# Altium PCB EtherWiz3K4KNic.PcbDoc (part 2 of 2)
Units mm, origin at the board's own origin, x right, y up, seen from the top; angles counter-clockwise.
Board outline 99.29 x 46.58 mm, 4 copper layers (Top Layer, GND, 5V, Bottom Layer), stack 1.582 mm thick; 69 components, 129 nets, 421 pads, 204 vias.
Unrouted connection lines stored in the file: 3.
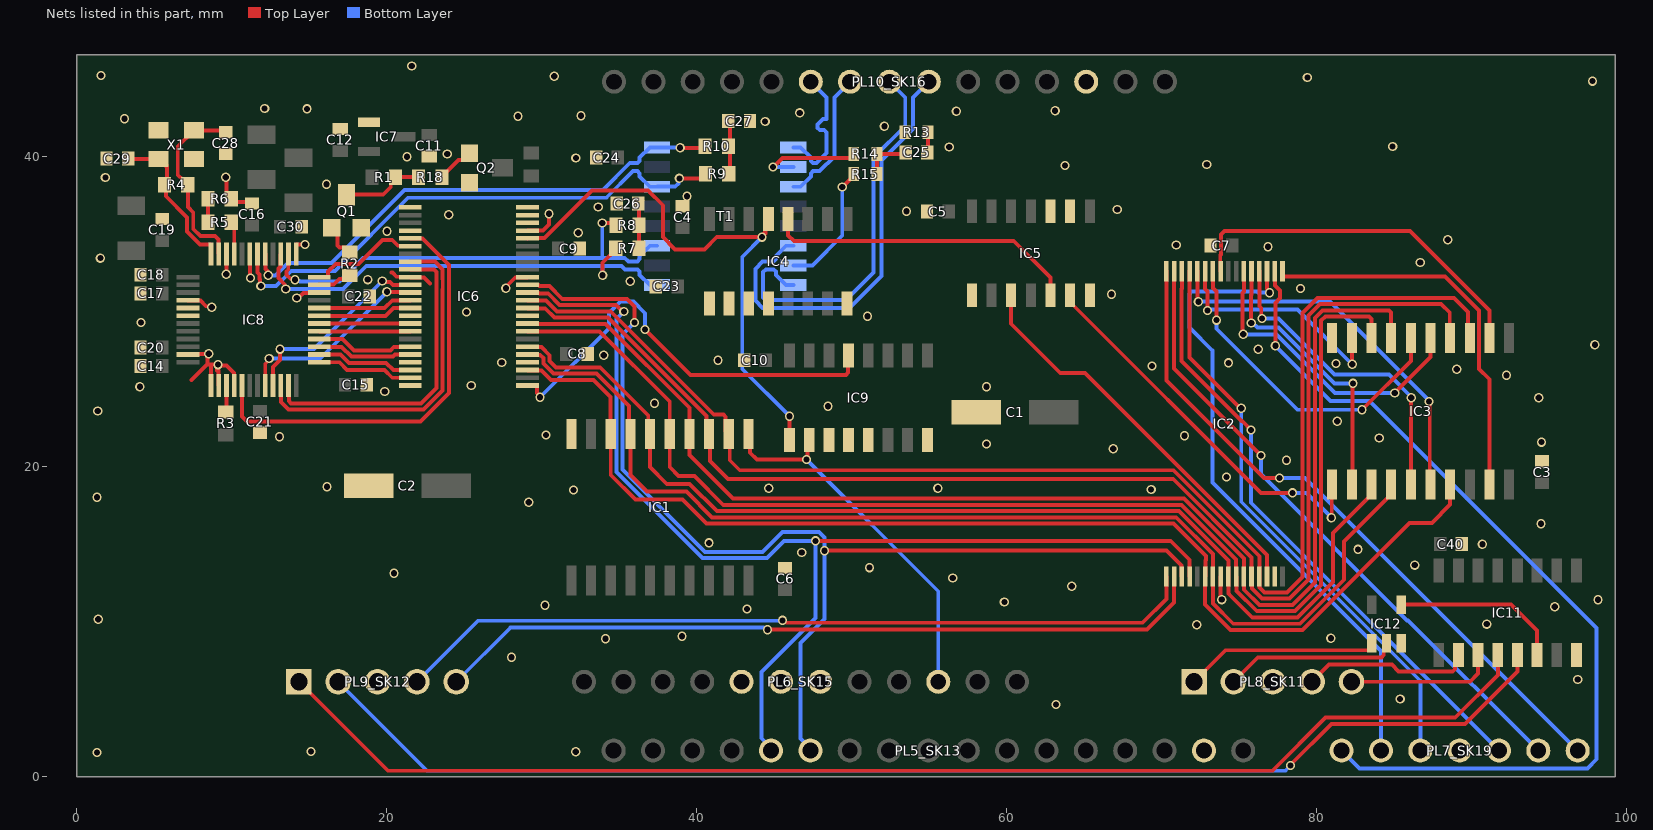
[diagram p4: the nets of this part, all layers, seen from the top]

## Via types
v1: diameter 0.6, hole 0.4, Top Layer to Bottom Layer, tented both sides, 204 vias

## Nets (pads, with @x,y where several pads share a name; then routed paths per layer and width w, separated by ;. In a path a pad name is that pad's centre, name@x,y a point inside that pad or via, vN(x,y) a via of type N, cw(c..) or ccw(c..) an arc to the next point about the centre after c; other vN are vias at no path point) (continued)
D1: IC1.8 IC2.22 IC3.17 IC6.3 | length 76
  Top Layer w0.254: IC6.3@29.094,26.244 29.117,26.221 29.976,26.221 30.59,25.608 33.345,25.608 34.44,24.514 34.44,22.13 IC1.8@34.458,22.113 34.458,19.467 36.043,17.882 39.091,17.882 40.648,16.324 70.795,16.324 72.875,14.245 72.875,13.982 72.848,13.955 72.848,12.947 IC2.22@72.825,12.924 72.825,11.113 74.474,9.463 79.123,9.463 86.026,16.366 87.461,16.366 88.645,17.55 IC3.17@88.645,18.859
D2: IC1.7 IC2.23 IC3.14 IC6.5 | length 73.1
  Top Layer w0.254: IC6.5@29.094,27.244 29.117,27.221 29.896,27.221 30.108,27.009 30.108,26.661 30.757,26.012 33.551,26.012 35.634,23.929 35.634,22.207 IC1.7@35.728,22.113 35.728,19.467 36.805,18.39 39.345,18.39 41.006,16.728 70.963,16.728 73.325,14.366 IC2.23@73.325,12.924 73.325,11.184 74.642,9.867 78.956,9.867 81.796,12.708 81.796,15.171 84.835,18.209 IC3.14@84.835,18.859
D3: IC1.6 IC2.25 IC3.13 IC6.6 | length 70.8
  Top Layer w0.254: IC6.6@29.094,27.744 29.117,27.721 29.988,27.721 30.512,27.196 30.512,26.828 30.924,26.416 33.782,26.416 36.878,23.32 36.878,22.232 IC1.6@36.998,22.113 36.998,19.975 38.075,18.898 39.548,18.898 41.313,17.132 71.13,17.132 74.325,13.938 IC2.25@74.325,12.924 74.325,11.816 74.479,11.662 74.479,11.661 75.868,10.271 78.788,10.271 81.077,12.56 81.077,15.722 83.565,18.209 IC3.13@83.565,18.859
D4: IC1.5 IC2.26 IC3.8 IC6.8 | length 84.8
  Top Layer w0.254: IC6.8@29.094,28.744 33.743,28.744 38.268,24.22 IC1.5@38.268,22.113 38.268,19.975 38.837,19.406 39.853,19.406 41.722,17.536 71.297,17.536 74.825,14.009 IC2.26@74.825,12.924 74.848,12.901 74.848,11.987 76.16,10.675 78.621,10.675 80.32,12.374 80.32,29.431 80.584,29.695 83.416,29.695 83.565,29.546 IC3.8@83.565,28.309
D5: IC1.4 IC2.27 IC3.7 IC6.9 | length 85.8
  Top Layer w0.254: IC6.9@29.094,29.244 29.116,29.222 34.123,29.222 39.538,23.807 IC1.4@39.538,22.113 39.538,20.757 42.354,17.94 71.465,17.94 75.325,14.08 IC2.27@75.325,12.924 ; IC2.27@75.335,12.914 75.348,12.901 75.348,12.059 76.327,11.079 78.454,11.079 79.916,12.541 79.916,29.598 80.416,30.099 84.686,30.099 84.835,29.95 IC3.7@84.835,28.309
D6: IC1.3 IC2.28 IC3.4 IC6.11 | length 89.7
  Top Layer w0.254: IC6.11@29.094,30.244 29.117,30.221 30.231,30.221 30.826,29.626 34.29,29.626 40.64,23.276 40.64,22.28 40.869,22.052 40.869,20.371 42.034,19.205 70.771,19.205 75.825,14.152 IC2.28@75.825,12.924 75.848,12.901 75.848,12.13 76.494,11.483 78.286,11.483 79.512,12.709 79.512,29.766 80.249,30.503 80.947,30.503 88.064,30.503 88.617,29.95 IC3.4@88.617,28.336
D7: IC1.2 IC2.29 IC3.3 IC6.12 | length 91.1
  Top Layer w0.254: IC6.12@29.094,30.744 30.279,30.744 30.993,30.03 34.457,30.03 41.109,23.378 41.731,23.378 41.88,23.229 41.88,22.311 IC1.2@42.078,22.113 ; IC1.2@42.139,22.113 42.139,20.422 42.786,19.774 70.773,19.774 76.325,14.223 IC2.29@76.325,12.924 76.348,12.901 76.348,12.21 76.67,11.887 78.119,11.887 79.108,12.876 79.108,29.933 80.082,30.907 88.879,30.907 89.789,29.997 89.789,28.435 IC3.3@89.915,28.309
ERX_N: IC8.5 R10.2 T1.8 | length 33.3
  Top Layer w0.254: IC8.5@12.156,33.732 12.164,33.724 12.164,32.755 12.289,32.63 12.289,32.425 v1(12.355,32.359) ; v1(38.938,40.589) 40.449,40.589 R10.2@40.55,40.691
  Bottom Layer w0.254: v1(12.355,32.359) 12.363,32.351 12.818,32.351 13.623,33.156 16.436,33.156 21.151,37.871 33.96,37.871 35.687,39.599 36.173,39.599 36.322,39.747 36.322,39.958 36.979,40.615 T1.8@37.449,40.615 37.461,40.602 38.925,40.602 v1(38.938,40.589)
ERX_P: IC8.6 R9.2 T1.6 | length 35
  Top Layer w0.254: IC8.6@11.656,33.732 11.656,32.544 11.778,32.422 11.778,32.12 11.806,32.092 11.806,31.733 v1(11.872,31.666) ; v1(38.887,38.616) 40.279,38.616 R9.2@40.576,38.913
  Bottom Layer w0.254: v1(11.872,31.666) 12.852,31.666 13.834,32.648 16.646,32.648 21.362,37.363 34.17,37.363 35.897,39.091 36.173,39.091 36.322,38.942 36.322,38.732 36.979,38.075 T1.6@37.449,38.075 37.461,38.087 38.623,38.087 38.821,38.285 38.821,38.55 v1(38.887,38.616)
ETX_N: IC8.2 R8.2 T1.3 | length 30
  Top Layer w0.254: IC8.2@13.656,33.732 13.656,33.137 13.641,33.122 13.641,32.72 13.521,32.6 13.521,32.389 13.773,32.137 14.007,32.137 v1(14.073,32.071) ; v1(33.909,35.738) 34.649,35.738 R8.2@34.834,35.553
  Bottom Layer w0.254: v1(14.073,32.071) 14.139,32.005 14.362,32.005 14.395,31.972 16.959,31.972 18.464,33.477 19.871,33.477 19.878,33.47 20.356,33.47 20.363,33.477 33.909,33.477 ; v1(33.909,35.738) 33.909,33.477 ; T1.3@37.449,34.265 36.979,34.265 36.322,33.608 36.322,33.397 36.173,33.249 35.593,33.249 35.364,33.477 33.909,33.477
ETX_P: IC8.3 R7.2 T1.1 | length 30.5
  Top Layer w0.254: IC8.3@13.156,33.732 13.133,33.709 13.133,32.93 13.013,32.81 13.013,32.179 13.414,31.778 13.414,31.544 v1(13.48,31.478) ; v1(33.934,32.36) 33.915,32.379 33.915,33.168 34.785,34.037 R7.2@34.785,34.112
  Bottom Layer w0.254: v1(13.48,31.478) 13.494,31.464 17.169,31.464 18.674,32.969 19.66,32.969 19.667,32.962 20.566,32.962 20.573,32.969 33.934,32.969 ; v1(33.934,32.36) 33.934,32.969 ; T1.1@37.449,31.725 36.979,31.725 36.322,32.382 36.322,32.592 36.173,32.741 35.382,32.741 35.154,32.969 33.934,32.969
GND: C1.2 C2.2 C3.1 C4.1 C5.1 C6.1 C7.1 C8.1 C9.1 C10.1 C11.1 C12.1 C14.1 C15.1 C16.1 C17.1 C18.1 C19.1 C20.1 C21.1 C22.1 C23.1 C24.1 C26.1 C27.1 C28.1 C29.1 C30.1 C40.1 IC1.10 IC2.24 IC3.10 IC4.3 IC4.4 IC4.8 IC5.7 IC5.9 IC5.10 IC6.4 IC6.10 IC6.15 IC6.21 IC6.22 IC6.23 IC6.24 IC6.25 IC6.28 IC6.34 IC6.39 IC6.45 IC6.48 IC7.1 IC8.1 IC8.7 IC8.10 IC8.16 IC8.23 IC8.25 IC8.26 IC8.28 IC8.46 IC9.3 IC9.4 IC9.5 IC9.8 IC11.8 IC12.3 PL5_SK13.16 PL6_SK15.5 PL6_SK15.7 PL7_SK19.4 PL8_SK11.3 PL9_SK12.3 PL10_SK16.13 Q1.2 Q2.2 R6.1 R13.1 X1.2 X1.4 | length 28.4
  Top Layer w0.254: IC8.23@7.168,27.244 7.191,27.267 v1@8.479,27.267 ; IC8.16@7.168,30.744 7.191,30.721 7.97,30.721 8.331,30.36 8.64,30.36 v1(8.706,30.294) ; 7.406,25.594 8.406,26.594 ; v1(8.506,27.294) v1@8.479,27.267 ; IC8.25@8.656,25.256 8.656,26.594 ; 9.04,26.228 9.04,26.528 v1(9.106,26.594) ; 9.133,26.228 9.133,25.279 IC8.26@9.156,25.256 ; v1(9.606,38.694) 9.658,38.642 9.658,37.592 10.156,37.094 C16.1@11.306,37.094 ; v1(9.64,32.428) 9.648,32.436 9.648,33.724 IC8.10@9.656,33.732 ; IC8.28@10.156,25.256 10.133,25.279 10.133,26.058 9.663,26.528 9.172,26.528 v1(9.106,26.594) ; IC8.7@11.156,33.732 11.179,33.71 11.179,32.206 v1(11.201,32.183) ; IC8.1@14.156,33.732 14.156,34.32 14.179,34.343 14.713,34.343 v1(14.721,34.351) ; v1(14.194,30.887) 14.287,30.887 14.621,31.221 15.621,31.221 IC8.46@15.644,31.244 ; 20.306,32.53 20.37,32.53 20.633,32.267 21.495,32.267 IC6.34@21.518,32.244 21.541,32.221 22.405,32.221 22.792,31.835 ; v1(27.689,31.518) 27.755,31.584 27.755,31.685 28.292,32.221 29.071,32.221 IC6.15@29.094,32.244 ; IC6.21@29.094,35.244 30.085,35.244 30.478,35.638 v1(30.478,36.337) ; C4.1@39.091,36.819 39.107,36.819 39.38,37.092 v1(39.38,37.462) ; IC2.24@73.825,12.924 73.825,11.594 73.902,11.517 v1(73.902,11.423) ; 8.406,26.594 8.656,26.594 ; 8.406,26.594 8.44,26.628 8.44,27.228 v1@8.479,27.267 ; 8.656,26.594 v1(9.106,26.594)
  other v1: 1.295,1.549 32.195,1.609 15.113,1.626 63.197,4.65 85.413,5.014 96.88,6.266 28.056,7.704 34.125,8.899 80.943,8.926 39.053,9.06 72.288,9.804 91.001,9.84 1.372,10.16 43.256,10.82 95.396,10.958 30.214,11.058 59.868,11.268 98.19,11.415 64.211,12.284 56.54,12.818 20.472,13.123 51.156,13.487 86.353,13.65 46.791,14.467 82.696,14.666 90.722,14.996 40.802,15.085 94.507,16.317 29.159,17.704 1.295,18.034 32.048,18.497 69.342,18.533 44.653,18.609 55.575,18.609 16.138,18.713 74.212,19.34 78.086,20.414 66.891,21.16 58.718,21.476 94.539,21.59 84.072,21.86 13.074,21.935 71.494,22.007 30.277,22.047 81.356,22.936 1.346,23.597 48.489,23.901 37.287,24.105 94.361,24.46 19.871,24.857 58.718,25.159 4.062,25.161 25.456,25.248 92.278,25.908 89.071,26.299 69.396,26.5 81.275,26.665 74.339,26.706 27.42,26.73 41.377,26.873 34.011,27.203 76.251,27.584 97.986,27.874 4.14,29.312 51.029,29.718 25.144,29.987 66.777,31.14 78.987,31.506 35.712,31.979 18.771,32.08 86.709,33.183 1.512,33.468 76.879,34.199 70.968,34.315 88.487,34.656 32.36,35.103 20.015,35.201 24.003,36.271 53.543,36.5 67.158,36.601 33.654,36.774 16.106,38.237 1.834,38.678 63.779,39.446 72.928,39.509 32.207,39.929 21.311,40.011 23.906,40.194 56.312,40.64 84.931,40.676 52.121,41.986 44.425,42.291 3.067,42.458 28.473,42.621 32.543,42.654 46.656,42.843 56.769,42.951 63.144,42.977 14.856,43.103 12.116,43.129 97.834,44.892 79.426,45.127 30.81,45.212 1.549,45.263 21.615,45.872
GND_CHASS: C25.1 R13.2 | length 1.3
  Top Layer w0.254: C25.1@54.898,40.292 54.948,40.342 R13.2@54.948,41.592
LA2: IC2.20 IC6.13 PL5_SK13.5 | length 73.8
  Top Layer w0.254: IC6.13@29.094,31.244 29.117,31.221 29.803,31.221 29.853,31.171 30.423,31.171 31.161,30.434 34.801,30.434 35.212,30.023 v1(35.306,30.023) ; v1(47.676,15.215) 70.606,15.215 71.825,13.996 IC2.20@71.825,12.924
  Bottom Layer w0.254: v1(35.306,30.023) 34.823,29.54 34.823,19.667 40.387,14.104 44.533,14.104 45.644,15.215 v1(47.676,15.215) 47.676,10.236 44.196,6.756 44.196,2.473 44.806,1.864 PL5_SK13.5@44.806,1.676
LA3: IC2.19 IC6.14 PL5_SK13.6 | length 73.1
  Top Layer w0.254: IC6.14@29.094,31.744 29.117,31.721 29.803,31.721 29.853,31.671 30.495,31.671 31.328,30.838 35.507,30.838 35.992,30.353 v1(35.992,29.312) ; v1(48.26,14.58) 48.285,14.605 70.336,14.605 71.302,13.639 71.302,12.947 IC2.19@71.325,12.924
  Bottom Layer w0.254: v1(35.992,29.312) 35.227,28.547 35.227,19.835 40.554,14.508 44.252,14.508 45.535,15.792 47.915,15.792 48.26,15.446 v1(48.26,14.58) 48.26,10.172 46.711,8.623 46.711,2.466 47.346,1.831 PL5_SK13.6@47.346,1.676
LA4: IC2.18 PL9_SK12.5 | length 50.3
  Top Layer w0.254: v1(44.573,9.483) 69.071,9.483 70.825,11.236 IC2.18@70.825,12.924
  Bottom Layer w0.254: PL9_SK12.5@24.486,6.121 28.001,9.637 44.326,9.637 44.479,9.483 v1(44.573,9.483)
LA5: IC2.17 PL9_SK12.4 | length 52.2
  Top Layer w0.254: v1(45.542,10.084) 45.636,10.084 45.788,9.931 68.783,9.931 70.325,11.473 IC2.17@70.325,12.924
  Bottom Layer w0.254: PL9_SK12.4@21.946,6.121 25.884,10.06 45.518,10.06 v1(45.542,10.084)
LA6: IC2.16 PL7_SK19.7 | length 43.5
  Top Layer w0.254: IC2.16@70.325,32.624 70.325,25.576 76.622,19.279 v1(77.622,19.279)
  Bottom Layer w0.254: v1(77.622,19.279) 79.273,19.279 PL7_SK19.7@96.876,1.676
LA7: IC2.15 PL7_SK19.6 | length 40.7
  Top Layer w0.254: IC2.15@70.825,32.624 70.825,26.33 v1(76.429,20.726)
  Bottom Layer w0.254: v1(76.429,20.726) 76.429,19.529 85.871,10.087 85.925,10.087 PL7_SK19.6@94.336,1.676
LA8: IC2.14 PL7_SK19.5 | length 39.5
  Top Layer w0.254: IC2.14@71.325,32.624 71.325,31.512 71.294,31.481 71.294,26.823 75.168,22.949 75.222,22.949 v1(75.794,22.377)
  Bottom Layer w0.254: v1(75.794,22.377) 75.794,17.678 PL7_SK19.5@91.796,1.676
LA9: IC2.13 PL7_SK19.3 | length 37.2
  Top Layer w0.254: IC2.13@71.825,32.624 71.825,31.266 71.813,31.254 71.813,27.066 75.105,23.774 v1(75.159,23.774)
  Bottom Layer w0.254: v1(75.159,23.774) 75.159,17.742 86.716,6.185 PL7_SK19.3@86.716,1.676
LA10: IC2.3 PL7_SK19.2 | length 41.3
  Top Layer w0.254: IC2.3@76.825,32.624 76.825,31.492 76.988,31.328 v1(76.988,31.235)
  Bottom Layer w0.254: v1(76.988,31.235) 76.247,31.235 76.18,31.302 71.962,31.302 71.813,31.153 71.813,28.977 73.3,27.491 73.3,18.979 84.176,8.103 PL7_SK19.2@84.176,1.676
LA11: IC2.2 PL7_SK19.1 | length 59
  Top Layer w0.254: IC2.2@77.325,32.624 77.325,31.714 77.673,31.365 77.673,30.886 77.361,30.574 v1(77.361,27.805)
  Bottom Layer w0.254: v1(77.361,27.805) 78.922,26.243 80.91,24.255 83.441,24.255 98.095,9.601 98.095,1.118 97.511,0.533 82.779,0.533 PL7_SK19.1@81.636,1.676
LA12: IC2.31 IC4.1
LA13: IC4.2 IC5.1
LA14: IC11.5 PL9_SK12.2 | length 82.2
  Top Layer w0.254: v1(78.334,0.711) 78.334,0.762 80.975,3.404 89.611,3.404 92.989,6.782 IC11.5@92.989,7.841
  Bottom Layer w0.254: PL9_SK12.2@16.866,6.121 22.608,0.379 78.001,0.379 v1(78.334,0.711)
LA15: IC11.4 PL9_SK12.1 | length 83.6
  Top Layer w0.254: PL9_SK12.1@14.326,6.121 20.068,0.379 77.163,0.379 80.592,3.808 88.974,3.808 91.719,6.553 IC11.4@91.719,7.841
LA16: IC11.3 PL8_SK11.5 | length 9.6
  Top Layer w0.254: PL8_SK11.5@82.271,6.121 89.916,6.121 90.449,6.655 IC11.3@90.449,7.841
LA17: IC11.2 PL8_SK11.4 | length 10.9
  Top Layer w0.254: PL8_SK11.4@79.731,6.121 80.833,7.223 84.877,7.223 85.319,6.782 88.808,6.782 88.956,6.931 88.956,7.618 IC11.2@89.179,7.841
LA18: IC12.2 PL8_SK11.2 | length 11.3
  Top Layer w0.254: PL8_SK11.2@74.651,6.121 76.225,7.696 84.209,7.696 84.358,7.845 84.358,8.432 IC12.2@84.531,8.605
LA21: IC12.1 PL8_SK11.1 | length 12.7
  Top Layer w0.254: PL8_SK11.1@72.111,6.121 74.143,8.153 83.408,8.153 83.581,8.326 IC12.1@83.581,8.605
LINK: IC8.17
NetC25_2: C25.2 R14.1 R15.1 | length 3.2
  Top Layer w0.254: R15.1@51.648,38.892 R14.1@51.648,40.192 53.398,40.192 C25.2@53.498,40.292
NetC26_2: C26.2 R7.1 R8.1 | length 2.9
  Top Layer w0.254: R7.1@36.289,34.098 R8.1@36.289,35.598 C26.2@36.289,37.048
NetC27_2: C27.2 R9.1 R10.1 | length 3.5
  Top Layer w0.254: R9.1@42.145,38.913 42.145,40.596 R10.1@42.05,40.691 42.15,40.79 C27.2@42.15,42.316
NetC28_2: C28.2 IC8.11 R4.2 X1.1 | length 12.2
  Top Layer w0.254: IC8.11@9.156,33.732 9.133,33.755 9.133,34.667 8.906,34.894 7.964,34.894 7.51,35.348 7.51,36.408 7.156,36.762 7.156,38.269 6.858,38.567 6.783,38.567 6.506,38.844 6.506,40.669 X1.1@7.556,41.719 9.481,41.719 C28.2@9.606,41.594
NetC29_2: C29.2 IC8.12 R4.1 X1.3 | length 10.1
  Top Layer w0.254: C29.2@3.306,39.894 3.331,39.869 5.381,39.869 5.779,39.471 5.779,39.349 5.806,39.322 5.806,38.344 R4.1@5.656,38.194 5.738,38.112 5.738,37.462 7.106,36.094 7.106,35.181 7.944,34.343 8.633,34.343 8.656,34.32 IC8.12@8.656,33.732
NetIC8_9: IC8.9 R5.2 | length 2.1
  Top Layer w0.254: R5.2@9.956,35.794 10.156,35.594 IC8.9@10.156,33.732
NetIC8_27: IC8.27 R3.1 | length 1.7
  Top Layer w0.254: R3.1@9.606,23.544 9.656,23.594 IC8.27@9.656,25.256
NetIC8_47: IC8.47 R2.1 | length 2.3
  Top Layer w0.254: IC8.47@15.644,31.744 15.667,31.767 16.579,31.767 16.933,32.121 17.258,32.121 17.556,32.419 R2.1@17.556,32.494
NetIC11_6: IC11.6 IC12.4 | length 11.1
  Top Layer w0.254: IC12.4@85.481,11.105 92.578,11.105 94.259,9.423 IC11.6@94.259,7.841
NetQ1_1: Q1.1 R2.2 | length 2.3
  Top Layer w0.254: Q1.1@16.364,35.417 16.385,35.417 16.806,34.996 16.806,34.294 16.958,34.142 17.308,34.142 R2.2@17.606,33.844
NetQ1_3: Q1.3 R1.1 R18.1 | length 5.3
  Top Layer w0.254: Q1.3@17.4,37.561 19.773,37.561 20.258,38.046 20.258,38.396 R1.1@20.556,38.694 R18.1@22.056,38.694
NetQ2_1: Q2.1 R18.2 | length 2.5
  Top Layer w0.254: R18.2@23.556,38.694 23.556,38.769 23.854,39.067 23.879,39.067 24.627,39.815 24.907,39.815 Q2.1@25.339,40.247
NetR5_1: R5.1 R6.2 | length 1.5
  Top Layer w0.254: R5.1@8.456,35.794 R6.2@8.456,37.294
NetR11_1: 
NetR12_1: 
NetR14_2: R14.2 T1.10 | length 6.9
  Top Layer w0.254: v1(44.933,39.345) 44.971,39.345 45.555,39.929 49.925,39.929 50.148,40.152 R14.2@50.148,40.192
  Bottom Layer w0.254: v1(44.933,39.345) T1.10@46.249,39.345
NetR15_2: R15.2 T1.15 | length 8.2
  Top Layer w0.254: v1@49.423,38.067 50.148,38.792 R15.2@50.148,38.892
  Bottom Layer w0.254: T1.15@46.249,32.995 47.473,32.995 49.403,34.925 v1@49.403,38.075
  other v1: 49.405,38.062
PA0: IC2.1 IC3.19 | length 25.4
  Top Layer w0.254: IC2.1@77.825,32.624 77.825,32.297 77.848,32.274 88.325,32.274 90.517,30.083 90.517,26.317 91.185,25.649 IC3.19@91.185,18.859
PA1: IC2.12 IC3.16 | length 25
  Top Layer w0.254: IC2.12@72.325,32.624 72.348,32.601 72.348,30.7 v1(72.39,30.658) ; v1(87.274,24.206) 87.324,24.156 87.324,18.909 IC3.16@87.375,18.859
  Bottom Layer w0.254: v1(72.39,30.658) 80.899,30.658 87.274,24.282 v1(87.274,24.206)
PA2: IC2.4 IC3.15 | length 20.5
  Top Layer w0.254: IC2.4@76.325,32.624 76.325,30.374 76.452,30.247 76.452,29.616 v1(76.502,29.566) ; IC3.15@86.105,18.859 86.118,18.873 86.118,24.447 v1(86.131,24.46)
  Bottom Layer w0.254: v1(76.502,29.566) 77.559,29.566 81.166,25.959 84.687,25.959 86.131,24.514 v1(86.131,24.46)
PA3: IC2.5 IC3.12 | length 18.1
  Top Layer w0.254: v1(75.806,29.286) 75.802,29.29 75.802,31.088 75.825,31.111 IC2.5@75.825,32.624 ; IC3.12@82.295,18.859 82.333,18.898 82.333,25.343 v1(82.372,25.382)
  Bottom Layer w0.254: v1(75.806,29.286) 75.899,29.286 76.197,28.989 77.564,28.989 81.171,25.382 v1(82.372,25.382)
PA4: IC2.11 IC3.9 | length 15.1
  Top Layer w0.254: IC2.11@72.825,32.624 72.825,31.467 72.979,31.313 72.979,30.085 v1(72.974,30.081) ; IC3.9@82.295,28.309 82.308,28.296 82.308,26.633 v1(82.321,26.619)
  Bottom Layer w0.254: v1(72.974,30.081) 73.036,30.143 78.798,30.143 v1(82.321,26.619)
PA5: IC2.10 IC3.6 | length 21.3
  Top Layer w0.254: IC2.10@73.325,32.624 73.325,31.539 73.558,31.305 v1(73.558,29.464) ; v1(82.956,23.678) 86.105,26.826 IC3.6@86.105,28.309
  Bottom Layer w0.254: v1(73.558,29.464) 73.554,29.459 73.554,28.91 78.785,23.678 v1(82.956,23.678)
PA6: IC2.6 IC3.5 | length 20
  Top Layer w0.254: v1(75.286,28.55) 75.229,28.607 75.229,31.209 75.325,31.305 IC2.6@75.325,32.624 ; v1(85.065,24.765) 87.375,27.075 IC3.5@87.375,28.309
  Bottom Layer w0.254: v1(75.286,28.55) 77.432,28.55 81.217,24.765 v1(85.065,24.765)
PA7: IC2.9 IC3.2 | length 23.7
  Top Layer w0.254: IC2.9@73.825,32.624 73.802,32.647 73.802,33.66 73.852,33.71 73.852,34.993 74.068,35.209 86.05,35.209 91.185,30.075 IC3.2@91.185,28.309
PR/W: IC1.1 IC9.2 PL6_SK15.10 | length 24.3
  Top Layer w0.254: IC1.1@43.348,22.113 43.458,22.002 43.458,20.905 43.891,20.472 v1(47.092,20.472) 47.158,20.539 47.158,21.608 IC9.2@47.275,21.724
  Bottom Layer w0.254: v1(47.092,20.472) 55.601,11.963 PL6_SK15.10@55.601,6.121
REF8M: PL6_SK15.6
ROM_Latch_nEN: IC3.11 IC5.6 | length 25.2
  Top Layer w0.254: IC5.6@64.115,31.062 64.313,30.864 64.313,30.427 76.426,18.313 v1(78.461,18.313) ; v1(80.975,16.713) 81,16.738 81,18.834 IC3.11@81.025,18.859
  Bottom Layer w0.254: v1(78.461,18.313) 79.375,18.313 v1(80.975,16.713)
ROM_Latch_nSel: IC4.12 IC5.5 | length 20.3
  Top Layer w0.254: IC4.12@45.91,35.999 45.91,34.939 46.275,34.574 60.475,34.574 62.845,32.204 IC5.5@62.845,31.062
ROM_nCS: IC2.30 IC5.3 | length 25.9
  Top Layer w0.254: IC5.3@60.305,31.062 60.305,29.23 63.475,26.06 65.059,26.06 76.825,14.295 IC2.30@76.825,12.924
RX_N: PL10_SK16.6 T1.9 | length 8.8
  Bottom Layer w0.254: T1.9@46.249,40.615 46.719,40.615 47.376,39.958 47.376,39.747 47.525,39.599 47.735,39.599 48.387,40.251 48.387,41.583 48.238,41.732 47.955,41.732 47.806,41.881 47.806,42.091 48.158,42.443 48.387,42.443 48.387,43.84 PL10_SK16.6@47.371,44.856
RX_P: PL10_SK16.7 T1.11 | length 8.8
  Bottom Layer w0.254: T1.11@46.249,38.075 46.719,38.075 47.376,38.732 47.376,38.942 47.525,39.091 47.945,39.091 48.895,40.04 48.895,43.84 PL10_SK16.7@49.911,44.856
SPEED: IC8.18
TX_N: PL10_SK16.9 T1.14 | length 28.2
  Bottom Layer w0.254: T1.14@46.249,34.265 45.779,34.265 45.122,33.608 45.122,33.397 44.973,33.249 44.265,33.249 43.79,32.773 43.79,30.727 44.265,30.251 49.867,30.251 51.939,32.323 51.939,39.762 53.975,41.798 53.975,43.84 PL10_SK16.9@54.991,44.856
TX_P: PL10_SK16.8 T1.16 | length 25.7
  Bottom Layer w0.254: T1.16@46.249,31.725 45.779,31.725 45.122,32.382 45.122,32.592 44.973,32.741 44.475,32.741 44.298,32.563 44.298,30.937 44.475,30.759 49.657,30.759 51.431,32.534 51.431,39.973 53.467,42.008 53.467,43.84 PL10_SK16.8@52.451,44.856
Wiz5_PR/W: IC6.1 IC9.13 | length 28.2
  Top Layer w0.254: IC6.1@29.094,25.244 29.682,25.244 29.704,25.221 29.704,24.771 29.896,24.579 v1(29.896,24.486) ; v1(36.663,28.865) 39.595,25.933 49.638,25.933 49.787,26.082 49.787,27.146 IC9.13@49.815,27.174
  Bottom Layer w0.254: v1(29.896,24.486) 34.341,28.931 34.341,29.921 35.077,30.658 35.916,30.658 36.663,29.91 v1(36.663,28.865)
Wiz_A0: IC6.36 IC8.32 | length 12.8
  Top Layer w0.254: IC8.32@12.156,25.256 12.156,26.651 12.406,26.901 v1(12.406,26.994) ; v1(20.006,31.294) 20.033,31.267 21.495,31.267 IC6.36@21.518,31.244
  Bottom Layer w0.254: v1(12.406,26.994) 15.706,26.994 v1(20.006,31.294)
Wiz_A1: IC6.35 IC8.33 | length 12.9
  Top Layer w0.254: IC8.33@12.656,25.256 12.656,26.428 13.106,26.878 v1(13.106,27.594) ; v1(19.706,31.994) 19.772,31.928 20.216,31.928 20.399,31.744 IC6.35@21.518,31.744
  Bottom Layer w0.254: v1(13.106,27.594) 15.306,27.594 v1(19.706,31.994)
Wiz_D0: IC6.47 IC8.37 | length 6.3
  Top Layer w0.254: IC8.37@15.644,26.744 16.942,26.744 17.442,26.244 19.856,26.244 20.356,25.744 IC6.47@21.518,25.744
Wiz_D1: IC6.46 IC8.38 | length 6.3
  Top Layer w0.254: IC8.38@15.644,27.244 17.013,27.244 17.548,26.709 19.962,26.709 20.427,26.244 IC6.46@21.518,26.244
Wiz_D2: IC6.44 IC8.39 | length 6.2
  Top Layer w0.254: IC8.39@15.644,27.744 17.085,27.744 17.716,27.113 20.412,27.113 20.543,27.244 IC6.44@21.518,27.244
Wiz_D3: IC6.43 IC8.40 | length 6.3
  Top Layer w0.254: IC8.40@15.644,28.244 17.156,28.244 17.883,27.517 20.245,27.517 20.449,27.721 21.495,27.721 IC6.43@21.518,27.744
Wiz_D4: IC6.41 IC8.41 | length 5.9
  Top Layer w0.254: IC8.41@15.644,28.744 IC6.41@21.518,28.744
Wiz_D5: IC6.40 IC8.42 | length 5.9
  Top Layer w0.254: IC8.42@15.644,29.244 IC6.40@21.518,29.244
Wiz_D6: IC6.38 IC8.43 | length 6.1
  Top Layer w0.254: IC8.43@15.644,29.744 19.927,29.744 20.427,30.244 IC6.38@21.518,30.244
Wiz_D7: IC6.37 IC8.44 | length 6.1
  Top Layer w0.254: IC8.44@15.644,30.244 19.856,30.244 20.356,30.744 IC6.37@21.518,30.744
Wiz_nRD: IC6.32 IC8.34 | length 22.4
  Top Layer w0.254: IC8.34@13.156,25.256 13.179,25.233 13.179,24.172 13.66,23.69 21.815,23.69 22.373,23.69 23.61,24.927 23.61,31.456 23.614,31.46 23.614,32.129 23.61,32.133 23.61,32.74 23.106,33.244 IC6.32@21.518,33.244
Wiz_nRst: IC6.30 IC8.48 | length 7.2
  Top Layer w0.254: IC8.48@15.644,32.244 16.186,32.244 16.209,32.267 16.209,32.597 16.706,33.094 18.184,33.094 19.714,34.624 20.356,34.624 20.713,34.267 21.495,34.267 IC6.30@21.518,34.244
Wiz_nSel: IC6.29 IC8.29 | length 27.7
  Top Layer w0.254: IC8.29@10.656,25.256 10.656,23.251 10.99,22.917 22.172,22.917 24.014,24.76 24.014,31.288 24.018,31.292 24.018,32.296 24.014,32.3 24.014,33.027 22.32,34.721 21.541,34.721 IC6.29@21.518,34.744
Wiz_nSel5: IC4.13 IC6.20 IC9.1 | length 36.8
  Top Layer w0.254: IC6.20@29.094,34.744 29.117,34.767 30.179,34.767 33.258,37.846 36.855,37.846 37.821,36.881 37.821,34.823 38.619,34.025 40.502,34.025 41.3,34.823 v1(44.221,34.823) ; IC4.13@44.441,35.8 44.441,35.043 v1(44.221,34.823) ; IC4.13@44.64,35.999 44.417,35.776 44.417,35.112 44.221,34.917 v1(44.221,34.823) ; v1(45.999,23.266) 46.002,23.264 46.002,21.727 IC9.1@46.005,21.724
  Bottom Layer w0.254: v1(44.221,34.823) 42.947,33.549 42.947,26.319 v1(45.999,23.266)
Wiz_nWR: IC6.33 IC8.35 | length 20.3
  Top Layer w0.254: IC8.35@13.656,25.256 13.679,25.233 13.679,24.243 13.828,24.094 22.206,24.094 23.206,25.094 23.206,31.623 23.21,31.627 23.21,31.962 23.206,31.966 23.206,32.572 23.057,32.721 21.541,32.721 IC6.33@21.518,32.744
pads on no net: IC4.7 IC4.9 IC4.10 IC4.11 IC4.14 IC4.15 IC5.8 IC6.26 IC6.27 IC8.19 IC8.20 IC8.21 IC8.30 IC9.7 IC9.9 IC9.10 IC9.11 IC9.12 IC9.14 IC9.15 IC11.7 IC11.9 IC11.10 IC11.11 IC11.12 IC11.13 IC11.14 PL10_SK16.1 PL10_SK16.2 PL10_SK16.3 PL10_SK16.4 PL10_SK16.5 PL10_SK16.10 PL10_SK16.11 PL10_SK16.12 PL10_SK16.14 PL10_SK16.15 T1.4 T1.5 T1.12 T1.13
copper on no net: | length 2.2
  GND w0.254: 9.506,30.394 9.506,31.252 10.451,32.197
  other v1: 7.006,33.994

## Polygon pours and split planes (outlines as drawn)
1v2d on Top Layer "1V2D_L01_P000" (solid, remove dead copper, pour order 0): 8.329,32.673 14.552,32.673 14.552,26.323 8.329,26.323
GND on Top Layer "GND_L01_P005" (solid, remove dead copper, pour order 5): 0,0 99.289,0 99.289,46.584 0,46.584
3v3 on 5V "3V3_L03_P004" (solid, remove dead copper, pour order 4): -7.239,46.584 -7.188,46.533 22.733,46.533 22.733,21.006 -7.188,21.006
5V on 5V "5V_L03_P011" (solid, pour order 11): 0,0 99.289,0 99.289,46.584 0,46.584
GND on GND "GND_L02_P002" (solid, pour order 2): 0,0 99.289,0 99.289,46.584 0,46.584
GND on Bottom Layer "GND_L04_P010" (solid, remove dead copper, pour order 10): 0,0 99.289,0 99.289,46.584 0,46.584

## Keep-outs
Keep-Out Layer:
  the board outline again, w0.203

## Other copper
Top Layer:
  text ".Project_Title" at 4.909,9.283 h1.52
  text ".PCB_RevNo" at 18.2,9.283 h1.52

## Silkscreen, mask and mechanical layers (free items; w line width, h text height)
Top Overlay:
  text ".Project_Title" at 64.36,39.619 h3
  text ".PCB_RevNo" at 90.36,39.619 h3
  text "(C) IanJ '25" at 80.772,36.5 h1.52
Board Shape:
  the board outline again, w0.203

## Dimensions
52.451,-3.785 to 19.431,0.483 on Mechanical 13
77.191,10.185 to 19.406,-7.645 on Mechanical 13
54.966,3.937 to 19.406,-2.769 on Mechanical 13
50.978,11.405 to 23.673,12.344 on Mechanical 13